# EAGLE board dueSkel3 (EAGLE 8.2.2)
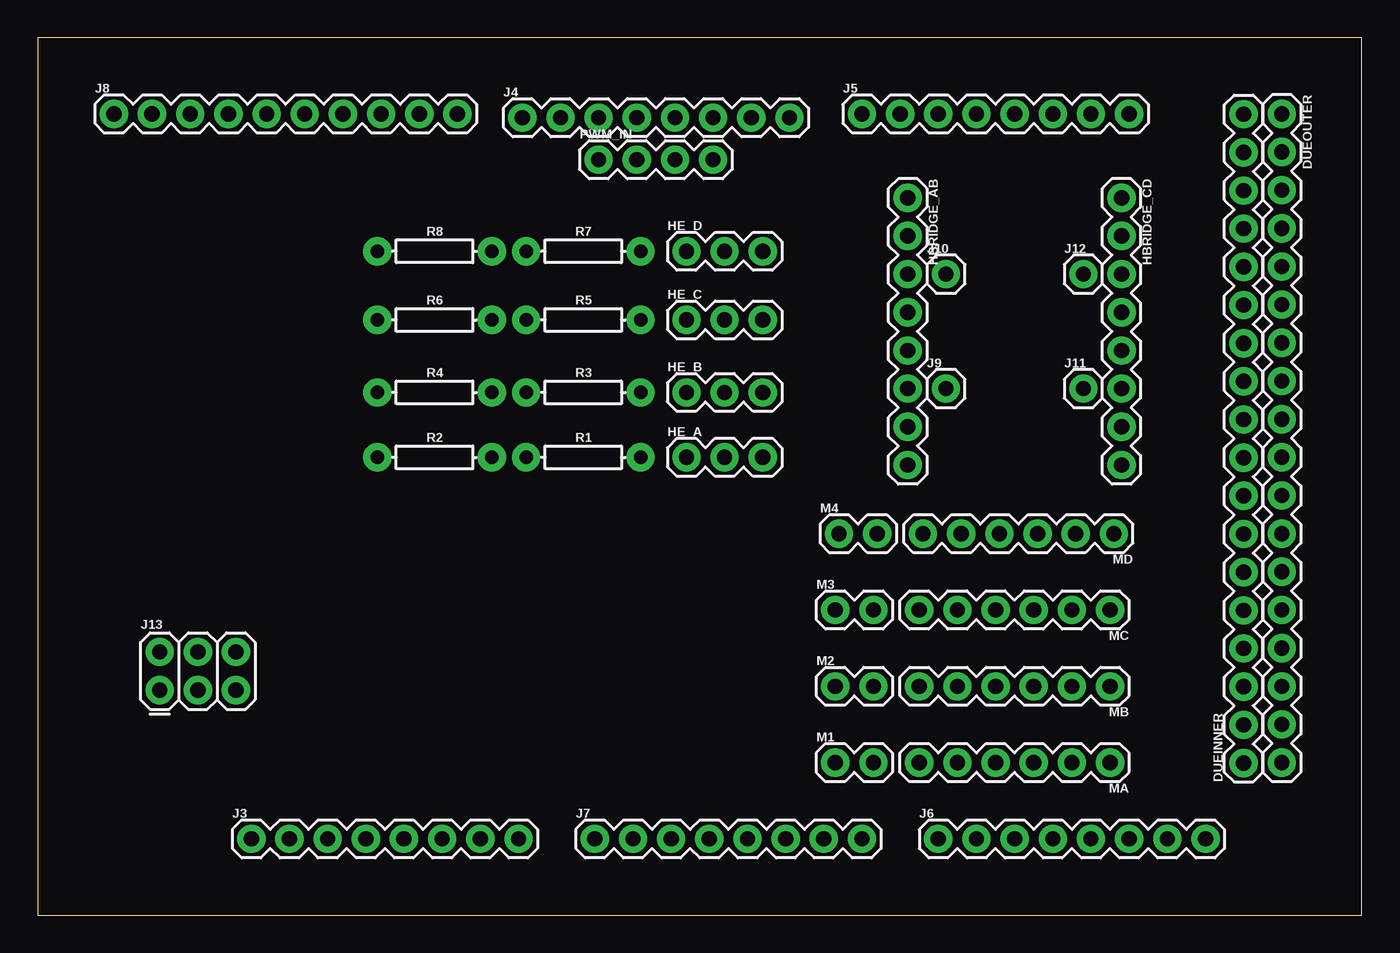
[diagram p0: board, top side]
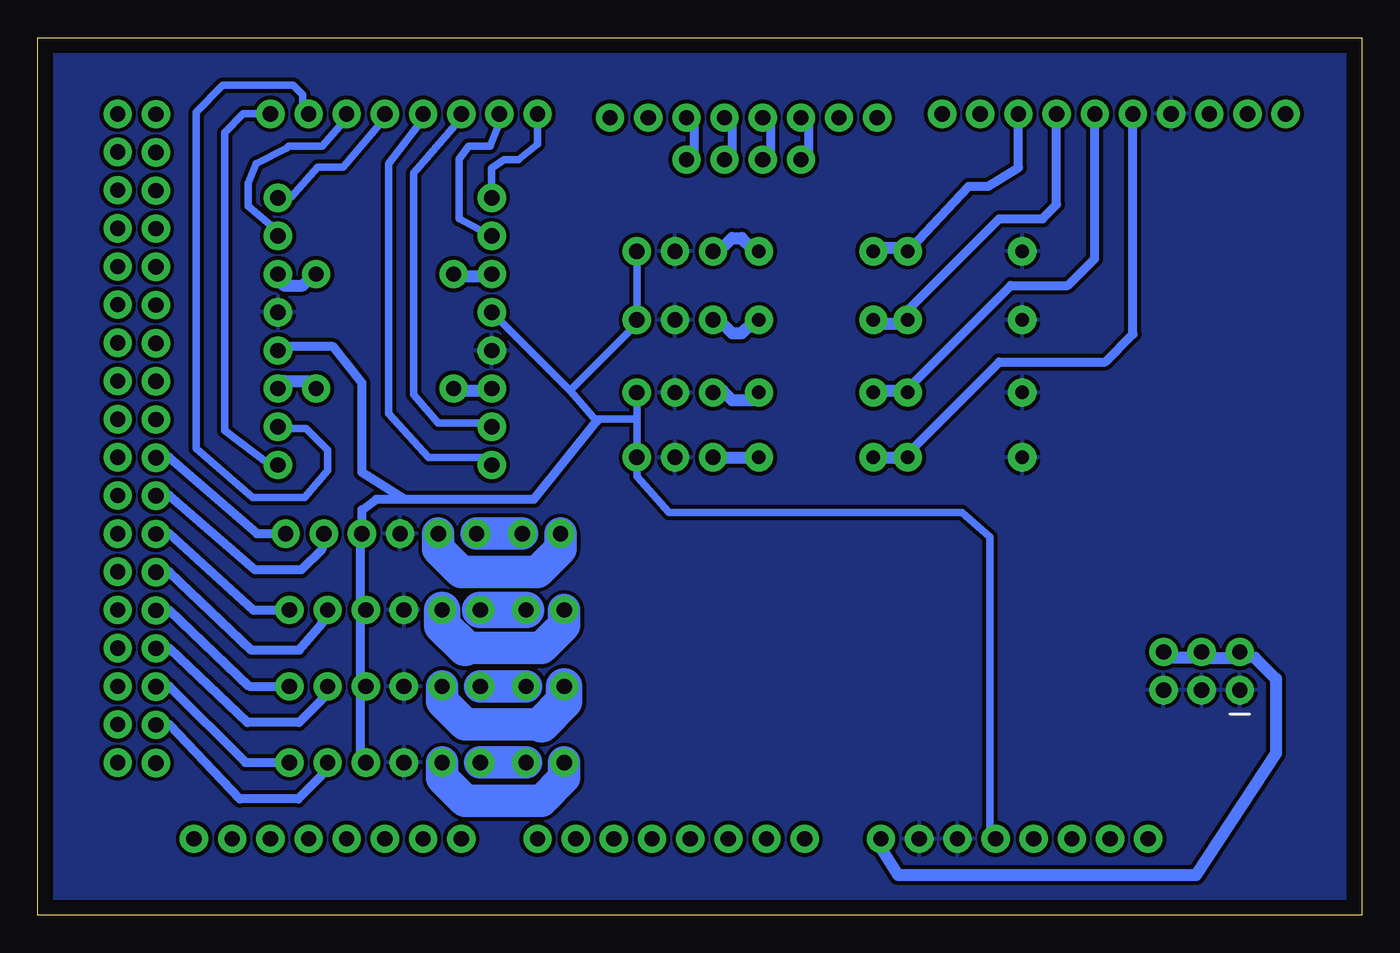
[diagram p1: board, bottom side, seen from below]

Size 88.14 x 58.42 mm. Coordinates in mm from the lower left corner, seen from the top.
Outline: 0,0 88.14,0 88.14,58.42 0,58.42 0,0
Copper layers (1*16): Top 0.035mm / dielectric 1.5mm / Bottom 0.035mm
Design rules "default *": minimum track width 16mil, minimum drill 0.35mm, track to track 6mil, track to pad 6mil, pad to pad 6mil, via to via 6mil, smd to smd 6mil, copper to edge 40mil, drill to drill 6mil, minimum pad ring 10mil, minimum via ring 8mil, stop-mask expansion 4mil, vias tented up to drill 0mil, thermal gap 10mil

## Footprints (pad centres in the part's own frame; a part is rotated, then mirrored left to right if it is on the bottom)
1X18 = drill 1.016 pad 1.88: 1 0,0; 2 2.54,0; 3 5.08,0; 4 7.62,0; 5 10.16,0; 6 12.7,0; 7 15.24,0; 8 17.78,0; 9 20.32,0; 10 22.86,0; 11 25.4,0; 12 27.94,0; 13 30.48,0; 14 33.02,0; 15 35.56,0; 16 38.1,0; 17 40.64,0; 18 43.18,0
1X08 = drill 1.016 pad 1.88: 1 0,0; 2 2.54,0; 3 5.08,0; 4 7.62,0; 5 10.16,0; 6 12.7,0; 7 15.24,0; 8 17.78,0
1X03 = drill 1.016 pad 1.88: 1 0,0; 2 2.54,0; 3 5.08,0
1X10 = drill 1.016 pad 1.88: 1 0,0; 2 2.54,0; 3 5.08,0; 4 7.62,0; 5 10.16,0; 6 12.7,0; 7 15.24,0; 8 17.78,0; 9 20.32,0; 10 22.86,0
1X01 = drill 1.016 pad 1.88: 1 0,0
2X3 = drill 1.016 pad 1.88: 1 0,0; 2 0,2.54; 3 2.54,0; 4 2.54,2.54; 5 5.08,0; 6 5.08,2.54
1X02 = drill 1.016 pad 1.88: 1 0,0; 2 2.54,0
1X06 = drill 1.016 pad 1.88: 1 0,0; 2 2.54,0; 3 5.08,0; 4 7.62,0; 5 10.16,0; 6 12.7,0
1X04 = drill 1.016 pad 1.88: 1 0,0; 2 2.54,0; 3 5.08,0; 4 7.62,0
AXIAL-0.3 = drill 0.9 pad 1.88: P$1 -3.81,0; P$2 3.81,0

## Placement (x,y rotation side)
DUEINNER  [1X18]  80.26,10.13 90 top
DUEOUTER  [1X18]  82.8,53.34 270 top
HBRIDGE_AB  [1X08]  57.91,47.75 270 top
HBRIDGE_CD  [1X08]  72.14,47.75 270 top
HE_A  [1X03]  43.18,30.48 0 top
HE_B  [1X03]  43.18,34.8 0 top
HE_C  [1X03]  43.18,39.62 0 top
HE_D  [1X03]  43.18,44.2 0 top
J3  [1X08]  14.22,5.08 0 top
J4  [1X08]  32.26,53.09 0 top
J5  [1X08]  54.86,53.34 0 top
J6  [1X08]  59.94,5.08 0 top
J7  [1X08]  37.08,5.08 0 top
J8  [1X10]  5.08,53.34 0 top
J9  [1X01]  60.45,35.05 0 top
J10  [1X01]  60.45,42.67 0 top
J11  [1X01]  69.6,35.05 0 top
J12  [1X01]  69.6,42.67 0 top
J13  FEMALE 2x3  [2X3]  8.13,14.99 0 top
M1  [1X02]  53.09,10.16 0 top
M2  [1X02]  53.09,15.24 0 top
M3  [1X02]  53.09,20.32 0 top
M4  [1X02]  53.34,25.4 0 top
MA  [1X06]  71.37,10.16 180 top
MB  [1X06]  71.37,15.24 180 top
MC  [1X06]  71.37,20.32 180 top
MD  [1X06]  71.63,25.4 180 top
PWM_IN  [1X04]  37.34,50.29 0 top
R1  10  [AXIAL-0.3]  36.32,30.48 0 top
R2  10  [AXIAL-0.3]  26.42,30.48 0 top
R3  10  [AXIAL-0.3]  36.32,34.8 0 top
R4  10  [AXIAL-0.3]  26.42,34.8 0 top
R5  10  [AXIAL-0.3]  36.32,39.62 0 top
R6  10  [AXIAL-0.3]  26.42,39.62 0 top
R7  10  [AXIAL-0.3]  36.32,44.2 0 top
R8  10  [AXIAL-0.3]  26.42,44.2 0 top

## Library data of the parts
DUEINNER DUEOUTER HE_A HE_B HE_C HE_D J9-J12 M1-M4 = SparkFun-Connectors
HBRIDGE_AB HBRIDGE_CD J3-J7 = SparkFun-Connectors; PROD_ID: CONN-08438
J8 = SparkFun-Connectors; PROD_ID: CONN-11563
J13 = SparkFun-Connectors; PROD_ID: CONN-11566
MA MB MC MD = SparkFun-Connectors; PROD_ID: CONN-08437
PWM_IN = SparkFun-Connectors; PROD_ID: CONN-09696
R1-R8 = SparkFun-Resistors; PROD_ID: RES-12180

## Nets
3.3V: J3.4
5V: HBRIDGE_AB.4 HBRIDGE_CD.5 HE_A.3 HE_B.3 HE_C.3 HE_D.3 J3.5 MA.3 MB.3 MC.3 MD.3
A0: J7.1
A1: J7.2
A2: J7.3
A3: J7.4
A4: J7.5
A5: J7.6
A6: J7.7
A7: J7.8
A8: J6.1
A9: J6.2
A10: J6.3
A11: J6.4
AREF: J8.3
CANRX: J6.7
CANTX: J6.8
D0: J4.8
D1: J4.7
D2: J4.6 PWM_IN.4
D3: J4.5 PWM_IN.3
D4: J4.4 PWM_IN.2
D5: J4.3 PWM_IN.1
D6: J4.2
D7: J4.1
D8: J8.10
D9: J8.9
D10: J8.8 R7.P$1 R8.P$2
D11: J8.7 R5.P$1 R6.P$2
D12: J8.6 R3.P$1 R4.P$2
D13: J8.5 R1.P$1 R2.P$2
D14: HBRIDGE_AB.1 J5.1
D15: HBRIDGE_AB.2 J5.2
D16: HBRIDGE_AB.7 J5.3
D17: HBRIDGE_AB.8 J5.4
D18: HBRIDGE_CD.1 J5.5
D19: HBRIDGE_CD.2 J5.6
D20: HBRIDGE_CD.7 J5.7
D21: HBRIDGE_CD.8 J5.8
D22: DUEINNER.17
D23: DUEOUTER.2
D24: DUEINNER.16
D25: DUEOUTER.3
D26: DUEINNER.15
D27: DUEOUTER.4
D28: DUEINNER.14
D29: DUEOUTER.5
D30: DUEINNER.13
D31: DUEOUTER.6
D32: DUEINNER.12
D33: DUEOUTER.7
D34: DUEINNER.11
D35: DUEOUTER.8
D36: DUEINNER.10
D37: DUEOUTER.9
D38: DUEINNER.9 MD.1
D39: DUEOUTER.10
D40: DUEINNER.8 MD.2
D41: DUEOUTER.11
D42: DUEINNER.7 MC.1
D43: DUEOUTER.12
D44: DUEINNER.6 MC.2
D45: DUEOUTER.13
D46: DUEINNER.5 MB.1
D47: DUEOUTER.14
D48: DUEINNER.4 MB.2
D49: DUEOUTER.15
D50: DUEINNER.3 MA.1
D51: DUEOUTER.16
D52: DUEINNER.2 MA.2
D53: DUEOUTER.17
DAC0: J6.5
DAC1: J6.6
GND: HBRIDGE_AB.5 HBRIDGE_CD.4 HE_A.2 HE_B.2 HE_C.2 HE_D.2 J3.6 J3.7 J8.4 J13.1 J13.3 J13.5 MA.4 MB.4 MC.4 MD.4 R2.P$1 R4.P$1 R6.P$1 R8.P$1
HB1_PWM1: HBRIDGE_AB.6 J9.1
HB1_PWM2: HBRIDGE_AB.3 J10.1
HB2_PWM1: HBRIDGE_CD.6 J11.1
HB2_PWM2: HBRIDGE_CD.3 J12.1
IOREF: J3.2
M1A: M1.2 MA.6
M1B: M1.1 MA.5
M2A: M2.2 MB.6
M2B: M2.1 MB.5
M3A: M3.2 MC.6
M3B: M3.1 MC.5
M4A: M4.2 MD.6
M4B: M4.1 MD.5
N$3: HE_A.1 R1.P$2
N$6: HE_B.1 R3.P$2
N$9: HE_C.1 R5.P$2
N$12: HE_D.1 R7.P$2
RESET: J3.3
SCL1: J8.1
SDA1: J8.2
VIN: J3.8 J13.2 J13.4 J13.6

## Tracks (layer width: path | path; a pad name or v marks a point on that pad's centre or on a via)
5V
  Bottom 0.406: 66.67,20.32 MC.3 | J3.5 24.77,5.08 | 50.8,33.02 50.93,32.89 | 66.67,25.4 MD.3 | 66.55,26.98
  Bottom 0.508: HE_D.3 HE_C.3 48.26,39.37 52.71,34.92 | 48.26,33.02 HE_A.3 48.26,29.21 46.1,26.8 26.62,26.8 24.77,25.19 24.77,5.08 | 48.26,33.02 HE_B.3 | 50.93,32.89 52.71,34.92 | 52.71,34.92 HBRIDGE_AB.4 | 48.26,33.02 50.8,33.02
  Bottom 0.61: 66.67,15.24 66.67,10.16 MA.3 | 66.67,25.4 66.67,20.32 66.67,15.24 | HBRIDGE_CD.5 71.88,37.85 68.45,37.85 66.55,35.43 66.55,29.48 63.75,27.7 65.53,27.69 | 66.67,15.24 MB.3 | 65.53,27.69 55.12,27.69 50.93,32.89 | 65.53,27.69 65.6,27.69 66.55,26.98 | MD.3 66.55,26.98
D2
  Bottom 0.61: PWM_IN.4 44.45,50.8 44.45,52.7 J4.6
D3
  Bottom 0.61: PWM_IN.3 41.91,50.8 41.91,52.7 J4.5
D4
  Bottom 0.61: PWM_IN.2 39.37,50.8 39.37,52.7 J4.4
D5
  Bottom 0.61: PWM_IN.1 36.83,50.8 36.83,52.7 J4.3
D10
  Bottom 0.61: J8.8 22.86,49.76 24.87,48.51 26.16,48.51 29.97,44.45 29.84,44.45 R8.P$2
  Bottom 0.813: R8.P$2 30.48,44.45 32.38,44.45 R7.P$1
D11
  Bottom 0.61: J8.7 20.32,47.3 21.26,46.35 24.13,46.35 30.48,40 R6.P$2
  Bottom 0.813: R6.P$2 30.48,39.37 32.38,39.37 R5.P$1
D12
  Bottom 0.61: J8.6 17.78,43.7 19.57,41.91 23.37,41.91 30.35,34.92 R4.P$2
  Bottom 0.813: R4.P$2 30.48,34.92 32.38,34.92 R3.P$1
D13
  Bottom 0.61: J8.5 15.24,38.67 17.08,36.83 24.13,36.83 30.48,30.48 R2.P$2
  Bottom 0.813: R1.P$1 30.48,30.48
D14
  Bottom 0.508: J5.1 54.86,51.31 56.13,50.29 57.09,50.29 57.91,49.72 HBRIDGE_AB.1
D15
  Bottom 0.508: HBRIDGE_AB.2 60.07,46.35 60.07,50.31 59.45,51.18 58.04,51.18 57.15,53.34 J5.2
D16
  Bottom 0.508: HBRIDGE_AB.7 58.42,32.77 61.47,32.77 63.12,34.67 63.12,49.4 59.69,53.34 J5.3
D17
  Bottom 0.508: HBRIDGE_AB.8 58.42,30.48 62.1,30.48 64.77,33.4 64.77,50.04 62.23,53.34 J5.4
D18
  Bottom 0.508: HBRIDGE_CD.1 71.75,47.75 71.25,47.78 69.5,49.78 67.82,49.78 64.77,53.34 J5.5
D19
  Bottom 0.508: HBRIDGE_CD.2 72.39,45.72 74.12,47.19 74.12,48.72 73.58,50.01 71.55,51.06 71.43,51.18 69.21,51.18 67.31,53.34 J5.6
D20
  Bottom 0.406: 70.48,54.61 70.5,54.61
  Bottom 0.508: 70.48,54.61 70.48,53.34 J5.7 | HBRIDGE_CD.7 71.75,32.38 70.26,32.38 68.83,30.96 68.83,29.59 70.36,27.81 73.83,27.81 77.6,31.08 77.6,53.47 75.82,55.24 71.14,55.24 70.5,54.61
D21
  Bottom 0.406: 72.39,53.34 J5.8
  Bottom 0.508: 72.39,53.34 74.44,53.34 75.69,52.09 75.69,32.26 72.64,29.97 HBRIDGE_CD.8
D38
  Bottom 0.61: MD.1 73.53,25.4 79.38,30.48 80.01,30.48 DUEINNER.9
D40
  Bottom 0.61: MD.2 69.21,25.4 69.21,24.36 70.58,22.99 73.66,22.99 79.38,27.94 80.01,27.94 DUEINNER.8
D42
  Bottom 0.61: MC.1 73.79,20.32 79.38,25.4 80.01,25.4 DUEINNER.7
D44
  Bottom 0.61: MC.2 69.21,20.32 69.21,19.41 70.72,17.65 73.91,17.65 79.38,22.86 80.01,22.86 DUEINNER.6
D46
  Bottom 0.61: MB.1 74.04,15.24 79.38,20.32 80.01,20.32 DUEINNER.5
D48
  Bottom 0.61: DUEINNER.4 80.01,17.78 79.38,17.78 74.17,12.83 70.74,12.83 68.83,14.73 MB.2
D50
  Bottom 0.61: MA.1 74.3,10.16 79.38,15.24 80.01,15.24 DUEINNER.3
D52
  Bottom 0.61: DUEINNER.2 80.01,12.7 79.38,12.7 74.68,7.75 70.8,7.75 68.83,9.71 MA.2
GND
  pour Bottom (isolate 0.254): 0,58.42 0,0 88.14,0 88.14,58.42
HB1_PWM1
  Bottom 0.813: HBRIDGE_AB.6 58.42,34.92 60.33,34.92 J9.1
HB1_PWM2
  Bottom 0.813: HBRIDGE_AB.3 58.42,42.54 60.33,42.54 J10.1
HB2_PWM1
  Bottom 0.813: J11.1 69.85,35.56 71.75,35.56 HBRIDGE_CD.6
HB2_PWM2
  Bottom 0.61: 72.39,42.54 HBRIDGE_CD.3
  Bottom 0.813: 72.39,42.54 71.75,41.91 70.48,41.91 69.85,42.54 J12.1
M1A
  Bottom 2.159: M1.2 MA.6
M1B
  Bottom 2.159: M1.1 53.09,9.14 54.61,7.62 59.69,7.62 61.21,9.14 MA.5
M2A
  Bottom 2.159: M2.2 MB.6
M2B
  Bottom 2.159: MB.5 61.21,14.22 59.69,12.7 54.61,12.7
  Bottom 2.413: M2.1 53.09,14.22 54.61,12.7
M3A
  Bottom 2.413: M3.2 MC.6
M3B
  Bottom 2.159: M3.1 53.09,19.3 54.61,17.78 59.69,17.78
  Bottom 2.413: MC.5 61.21,19.3 59.69,17.78
M4A
  Bottom 2.159: M4.2 MD.6
M4B
  Bottom 2.159: M4.1 53.34,24.38 54.86,22.86 59.94,22.86 61.47,24.38 MD.5
N$3
  Bottom 0.813: HE_A.1 R1.P$2
N$6
  Bottom 0.61: 43.18,34.92 HE_B.1
  Bottom 0.813: 43.18,34.92 42.55,34.92 41.91,34.29 40.64,34.29 R3.P$2
N$9
  Bottom 0.813: R5.P$2 40.64,39.37 41.28,38.73 41.91,38.73 42.55,39.37 43.18,39.37 HE_C.1
N$12
  Bottom 0.813: R7.P$2 40.64,44.45 41.28,45.08 41.91,45.08 42.55,44.45 43.18,44.45 HE_D.1
VIN
  Bottom 0.406: 7.12,17.14 7.62,17.14 | 5.71,15.75 5.72,15.75
  Bottom 0.61: 8.26,17.14 J13.2 | 10.79,17.14 J13.4
  Bottom 0.813: 8.26,17.14 10.16,17.14 J13.4 | 10.79,17.14 12.7,17.14 J13.6 | 5.71,15.75 5.71,10.79 11.05,2.67 30.86,2.67 32.38,5.08 J3.8 | 7.62,17.14 J13.2 | 5.72,15.75 7.12,17.14